# EAGLE board SonoluxV1 (EAGLE 9.7.0)
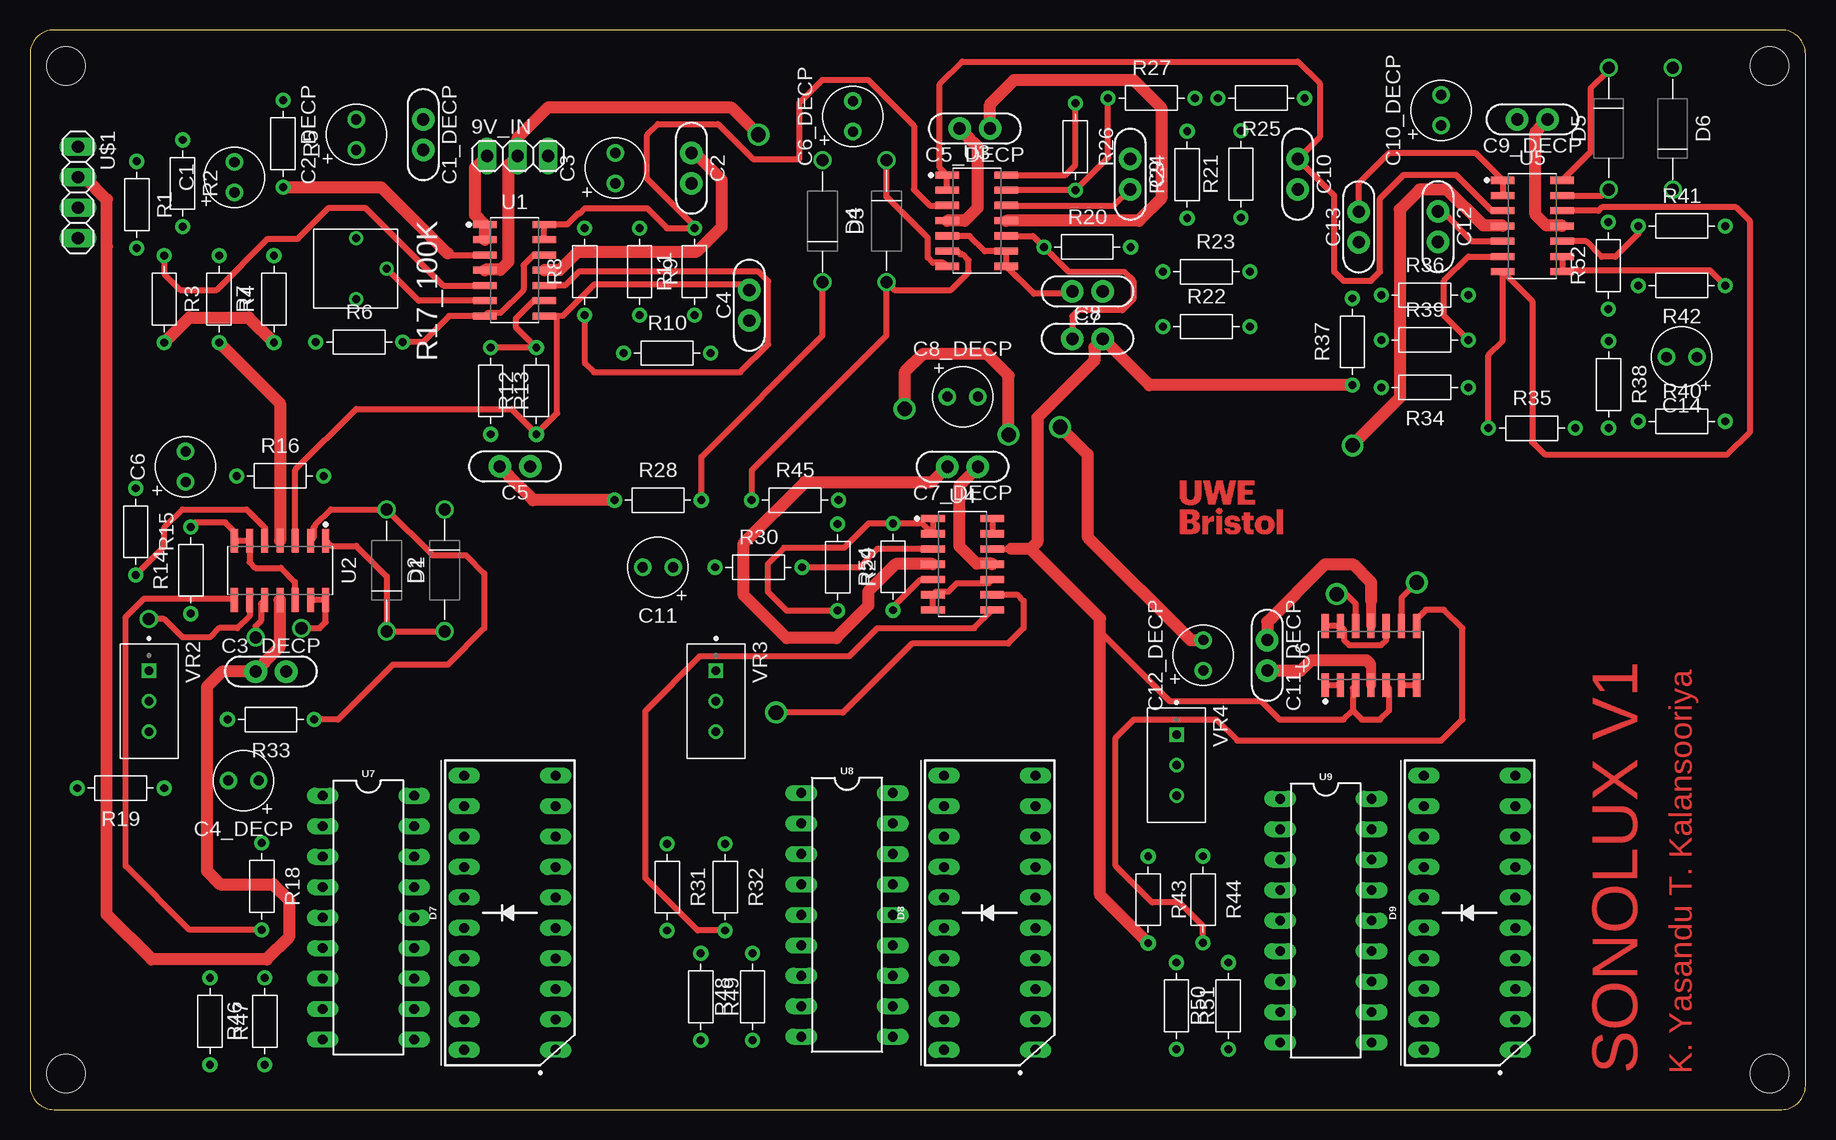
[diagram p0: board, top side]
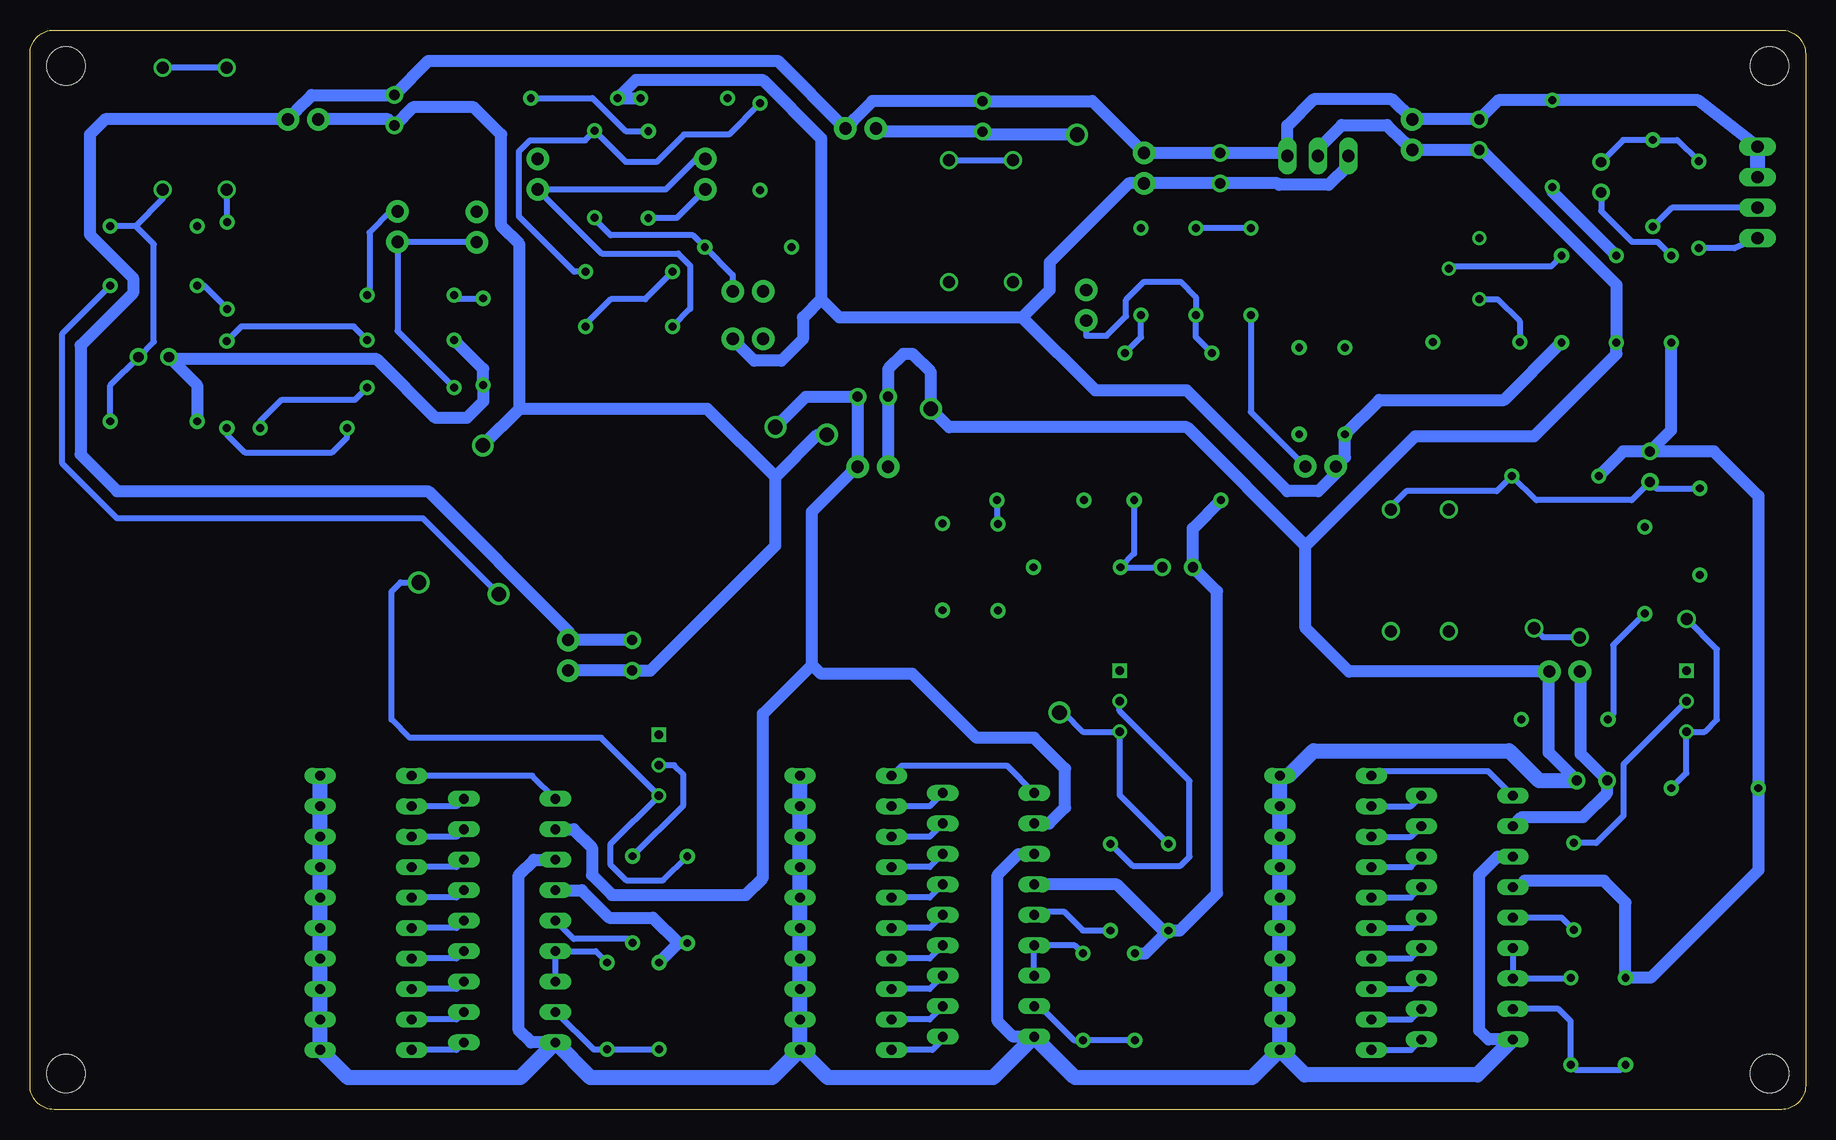
[diagram p1: board, bottom side, seen from below]

Size 148 x 90 mm. Coordinates in mm from the lower left corner, seen from the top.
Outline: 0,88 0,2 arc90 2,0 146,0 arc90 148,2 148,88 arc90 146,90 2,90 arc90 0,88
Copper layers (1*16): Top 0.035mm / dielectric 1.5mm / Bottom 0.035mm
Design rules "Fusion Electronics Design Rules": minimum track width 19mil, minimum drill 0.35mm, track to track 19mil, track to pad 15mil, pad to pad 19mil, via to via 19mil, smd to smd 19mil, copper to edge 40mil, drill to drill 6mil, minimum pad ring 10mil, minimum via ring 8mil, stop-mask expansion 4mil, vias tented up to drill 9999mil, thermal gap 10mil
Holes 3.2 mm at 3,87 3,3 145,3 145,87

## Footprints (pad centres in the part's own frame; a part is rotated, then mirrored left to right if it is on the bottom)
1X03 = drill 1.016 long: 1 -2.54,0; 2 0,0; 3 2.54,0
CAPPRD254W65D500H1150B = drill 0.85 pad 1.45: 1 -1.27,0; 2 1.27,0
CAP-THRU-2.54MM = drill 1.016 pad 1.88: 1 -1.27,0; 2 1.27,0
DIODE-AXIAL = drill 1: 1 -5.08,0; 2 5.08,0
LED_BARGRAPH_10 = drill 0.813 long: 1 -11.43,-3.81; 2 -8.89,-3.81; 3 -6.35,-3.81; 4 -3.81,-3.81; 5 -1.27,-3.81; 6 1.27,-3.81; 7 3.81,-3.81; 8 6.35,-3.81; 9 8.89,-3.81; 10 11.43,-3.81; 11 11.43,3.81; 12 8.89,3.81; 13 6.35,3.81; 14 3.81,3.81; 15 1.27,3.81; 16 -1.27,3.81; 17 -3.81,3.81; 18 -6.35,3.81; 19 -8.89,3.81; 20 -11.43,3.81
RESAD724W46L381D178B = drill 0.66 pad 1.26: 1 -3.62,0; 2 3.62,0
3362P-1-103LF = drill 0.66: 1 -2.54,0; 2 0,2.54; 3 2.54,0
SOIC127P600X175-14N = smd 1.968 x 0.599: 1 -2.473,3.81; 2 -2.473,2.54; 3 -2.473,1.27; 4 -2.473,0; 5 -2.473,-1.27; 6 -2.473,-2.54; 7 -2.473,-3.81; 8 2.473,-3.81; 9 2.473,-2.54; 10 2.473,-1.27; 11 2.473,0; 12 2.473,1.27; 13 2.473,2.54; 14 2.473,3.81
DIL18 = drill 0.813 long: 1 -10.16,-3.81; 2 -7.62,-3.81; 3 -5.08,-3.81; 4 -2.54,-3.81; 5 0,-3.81; 6 2.54,-3.81; 7 5.08,-3.81; 8 7.62,-3.81; 9 10.16,-3.81; 10 10.16,3.81; 11 7.62,3.81; 12 5.08,3.81; 13 2.54,3.81; 14 0,3.81; 15 -2.54,3.81; 16 -5.08,3.81; 17 -7.62,3.81; 18 -10.16,3.81
1X04 = drill 1.016 long: 1 -3.81,0; 2 -1.27,0; 3 1.27,0; 4 3.81,0
TRIM_3296W-1-103LF = drill 0.71 square: 1 -2.54,0 | drill 0.71: 2 0,0; 3 2.54,0

## Placement (x,y rotation side)
9V_IN  PINHD-1X03_1X03M  [1X03]  40.66,79.5 0 top
C1  3.3uF  [CAPPRD254W65D500H1150B]  17.03,77.72 90 top
C1_DECP  100nF  [CAP-THRU-2.54MM]  32.78,81.28 270 top
C2  100nF  [CAP-THRU-2.54MM]  55.13,78.48 270 top
C2_DECP  10uF  [CAPPRD254W65D500H1150B]  27.19,81.28 90 top
C3  10uF  [CAPPRD254W65D500H1150B]  48.78,78.48 90 top
C3_DECP  100nF  [CAP-THRU-2.54MM]  20.08,36.52 0 top
C4  47nF  [CAP-THRU-2.54MM]  59.96,67.05 90 top
C4_DECP  10uF  [CAPPRD254W65D500H1150B]  17.8,27.43 180 top
C5  47nF  [CAP-THRU-2.54MM]  40.43,53.62 180 top
C5_DECP  100nF  [CAP-THRU-2.54MM]  78.76,81.78 180 top
C6  1uF  [CAPPRD254W65D500H1150B]  12.97,53.59 90 top
C6_DECP  10uF  [CAPPRD254W65D500H1150B]  68.6,82.8 90 top
C7  22nF  [CAP-THRU-2.54MM]  88.15,68.2 180 top
C7_DECP  100nF  [CAP-THRU-2.54MM]  77.74,53.59 180 top
C8  10nF  [CAP-THRU-2.54MM]  88.15,64.26 0 top
C8_DECP  10uF  [CAPPRD254W65D500H1150B]  77.74,59.43 0 top
C9  47nF  [CAP-THRU-2.54MM]  91.71,77.97 270 top
C9_DECP  100nF  [CAP-THRU-2.54MM]  125.24,82.55 180 top
C10  47nF  [CAP-THRU-2.54MM]  105.68,77.97 270 top
C10_DECP  10uF  [CAPPRD254W65D500H1150B]  117.62,83.31 90 top
C11  1uF  [CAPPRD254W65D500H1150B]  52.34,45.21 180 top
C11_DECP  100nF  [CAP-THRU-2.54MM]  103.14,37.87 270 top
C12  10nF  [CAP-THRU-2.54MM]  117.36,73.61 270 top
C12_DECP  10uF  [CAPPRD254W65D500H1150B]  97.81,37.87 90 top
C13  10nF  [CAP-THRU-2.54MM]  110.76,73.58 90 top
C14  1uF  [CAPPRD254W65D500H1150B]  137.68,62.73 180 top
D1  DIODEDIODE-AXIAL  [DIODE-AXIAL]  29.73,44.95 270 top
D2  DIODEDIODE-AXIAL  [DIODE-AXIAL]  34.56,44.95 90 top
D3  DIODEDIODE-AXIAL  [DIODE-AXIAL]  71.39,74.06 90 top
D4  DIODEDIODE-AXIAL  [DIODE-AXIAL]  66.06,74.06 270 top
D5  DIODEDIODE-AXIAL  [DIODE-AXIAL]  131.59,81.78 90 top
D6  DIODEDIODE-AXIAL  [DIODE-AXIAL]  136.92,81.78 270 top
D7  RED  [LED_BARGRAPH_10]  40,16.4 90 top
D8  RED  [LED_BARGRAPH_10]  80,16.4 90 top
D9  RED  [LED_BARGRAPH_10]  120,16.4 90 top
R1  2.2k  [RESAD724W46L381D178B]  8.91,75.43 270 top
R2  2.2k  [RESAD724W46L381D178B]  12.72,77.21 270 top
R3  10k  [RESAD724W46L381D178B]  11.19,67.56 270 top
R4  10k  [RESAD724W46L381D178B]  15.76,67.56 270 top
R5  10k  [RESAD724W46L381D178B]  21.1,80.51 270 top
R6  2.2k  [RESAD724W46L381D178B]  27.45,63.98 0 top
R7  10k  [RESAD724W46L381D178B]  20.34,67.56 90 top
R8  8.2k  [RESAD724W46L381D178B]  46.24,69.85 90 top
R9  820  [RESAD724W46L381D178B]  50.82,69.85 270 top
R10  8.2k  [RESAD724W46L381D178B]  53.1,63.06 0 top
R11  820  [RESAD724W46L381D178B]  55.39,69.85 90 top
R12  5.6k  [RESAD724W46L381D178B]  42.21,59.91 90 top
R13  10k  [RESAD724W46L381D178B]  38.4,59.91 270 top
R14  10k  [RESAD724W46L381D178B]  13.41,44.96 90 top
R15  1k  [RESAD724W46L381D178B]  8.81,48.17 270 top
R16  100k  [RESAD724W46L381D178B]  20.84,52.83 0 top
R17_100K  3362P-1-103LF  [3362P-1-103LF]  27.19,70.1 270 top
R18  2.2k  [RESAD724W46L381D178B]  19.32,18.61 270 top
R19  10k  [RESAD724W46L381D178B]  7.55,26.79 180 top
R20  5.6k  [RESAD724W46L381D178B]  88.13,71.9 0 top
R21  3.3k  [RESAD724W46L381D178B]  100.93,77.97 90 top
R22  8.2k  [RESAD724W46L381D178B]  98.06,65.27 0 top
R23  820  [RESAD724W46L381D178B]  98.06,69.85 0 top
R24  8.2k  [RESAD724W46L381D178B]  96.46,77.95 90 top
R25  820  [RESAD724W46L381D178B]  102.63,84.32 180 top
R26  3.3k  [RESAD724W46L381D178B]  87.14,80.26 270 top
R27  5.6k  [RESAD724W46L381D178B]  93.49,84.32 0 top
R28  100k  [RESAD724W46L381D178B]  52.34,50.8 0 top
R29  10k  [RESAD724W46L381D178B]  67.33,45.21 270 top
R30  1k  [RESAD724W46L381D178B]  60.72,45.21 0 top
R31  10k  [RESAD724W46L381D178B]  53.12,18.54 270 top
R32  2.2k  [RESAD724W46L381D178B]  57.94,18.54 270 top
R33  10k  [RESAD724W46L381D178B]  20.08,32.51 180 top
R34  6.2k  [RESAD724W46L381D178B]  116.26,60.19 180 top
R35  180  [RESAD724W46L381D178B]  125.2,56.8 0 top
R36  6.2k  [RESAD724W46L381D178B]  116.27,67.89 0 top
R37  180  [RESAD724W46L381D178B]  110.23,64 90 top
R38  5.6k  [RESAD724W46L381D178B]  131.59,60.45 270 top
R39  10k  [RESAD724W46L381D178B]  116.27,64.16 0 top
R40  100k  [RESAD724W46L381D178B]  137.68,57.37 0 top
R41  1k  [RESAD724W46L381D178B]  137.68,73.66 0 top
R42  10k  [RESAD724W46L381D178B]  137.68,68.7 180 top
R43  10k  [RESAD724W46L381D178B]  93.21,17.5 270 top
R44  2.2k  [RESAD724W46L381D178B]  97.78,17.51 270 top
R45  10k  [RESAD724W46L381D178B]  63.77,50.8 0 top
R46  1.2k  [RESAD724W46L381D178B]  19.57,7.36 90 top
R47  1.5k  [RESAD724W46L381D178B]  15,7.36 270 top
R48  1.2k  [RESAD724W46L381D178B]  60.23,9.39 90 top
R49  1.5k  [RESAD724W46L381D178B]  55.91,9.39 270 top
R50  1.2k  [RESAD724W46L381D178B]  99.89,8.63 90 top
R51  1.5k  [RESAD724W46L381D178B]  95.57,8.63 270 top
R52  10k  [RESAD724W46L381D178B]  131.56,70.35 90 top
R54  0  [RESAD724W46L381D178B]  71.94,45.25 90 top
U1  LM324_SOIC  [SOIC127P600X175-14N]  40.39,69.97 0 top
U2  LM324_SOIC  [SOIC127P600X175-14N]  20.84,44.95 270 top
U3  LM324_SOIC  [SOIC127P600X175-14N]  78.92,74.1 0 top
U4  LM324_SOIC  [SOIC127P600X175-14N]  77.74,45.46 0 top
U5  LM324_SOIC  [SOIC127P600X175-14N]  125.24,73.66 0 top
U6  LM324_SOIC  [SOIC127P600X175-14N]  111.78,37.84 90 top
U7  LM391N  [DIL18]  28.21,16 270 top
U8  LM391N  [DIL18]  68.1,16.23 270 top
U9  LM391N  [DIL18]  108.01,15.74 270 top
U$1  PINHD-1X04_1X04M  [1X04]  4,76.45 270 top
VR2  3296W-1-103LF  [TRIM_3296W-1-103LF]  9.92,34.03 270 top
VR3  3296W-1-103LF  [TRIM_3296W-1-103LF]  57.18,34.03 270 top
VR4  3296W-1-103LF  [TRIM_3296W-1-103LF]  95.57,28.7 270 top

## Library data of the parts
9V_IN C1 C1_DECP C2 C2_DECP C3 C3_DECP C4 C4_DECP C5 C5_DECP C6 C6_DECP C7 C7_DECP C8 C8_DECP C9 C9_DECP C10 C10_DECP C11 C11_DECP C12 C12_DECP C13 C14 D1-D6 U$1 = Tinkercad
D7-D9 = SparkFun-LED; PROD_ID: DIO-10615
R1-R5 R54 = Tutorial - Fusion 360; CATEGORY: Resistor; SUB-CATEGORY: Fixed
R6-R16 R18-R52 = Resistor; CATEGORY: Resistors; DESCRIPTION: Axial Resistor 7.24 mm pitch 3.81 mm body length 1.78 mm body diameter; PACKAGE_SIZE: AXIAL; PACKAGE_TYPE: THT
R17_100K = Potentiometer_Trimmers; CREATED_PN: PCBLayout.com; DIGIKEY_PN: 3362P-103LF-ND; MANUFACTURER: Bourns Inc.; MPN: 3362P-1-103LF
U1-U6 = IC_Linear; CATEGORY: Linear ICs; DESCRIPTION: General Purpose Amplifier 4 Circuit 14-SOIC Generic; PACKAGE_SIZE: 14-SOIC; PACKAGE_TYPE: Surface Mount; SERIES: LM324; SUBCATEGORY: Amplifiers; TYPE: General Purpose
U7-U9 = SparkFun-IC-Special-Function; SF_ID: COM-12694
VR2-VR4 = 3296W-1-103LF; AVAILABILITY: In Stock; CHECK_PRICES: https://www.snapeda.com/parts/3296W-1-103LF/Bourns/view-part/?ref=eda; DESCRIPTION: Trimmer, Cermet, Rest 10 Kilohms, PCB, 25 Turns, Pwr-Rtg 0.5W, 3296 Series | Bourns 3296W-1-103LF; MF: Bourns; MP: 3296W-1-103LF; PACKAGE: NON STANDARD-3 Bourns; PRICE: None; SNAPEDA_LINK: https://www.snapeda.com/parts/3296W-1-103LF/Bourns/view-part/?ref=snap

## Nets
9V: 9V_IN.2 C1_DECP.2 C2_DECP.1 C3_DECP.2 C4_DECP.1 C5_DECP.2 C6_DECP.1 C7_DECP.2 C8_DECP.1 C9_DECP.2 C10_DECP.1 C11_DECP.2 C12_DECP.1 D7.1 D7.2 D7.3 D7.4 D7.5 D7.6 D7.7 D7.8 D7.9 D7.10 D8.1 D8.2 D8.3 D8.4 D8.5 D8.6 D8.7 D8.8 D8.9 D8.10 D9.1 D9.2 D9.3 D9.4 D9.5 D9.6 D9.7 D9.8 D9.9 D9.10 R4.2 U1.4 U2.4 U3.4 U4.4 U5.4 U6.4 U7.3 U7.9 U8.3 U8.9 U9.3 U9.9
BPF_GAIN_OUT: R32.2 U4.8 U8.5
BPF_OUT: C7.2 U3.5 U3.8 U3.9
BPF_PKD_OUT: R29.2 R54.2 U4.1 U4.2
GND: 9V_IN.3 C1_DECP.1 C2.1 C2_DECP.2 C3.2 C3_DECP.1 C4_DECP.2 C5_DECP.1 C6_DECP.2 C7_DECP.1 C8_DECP.2 C9_DECP.1 C10_DECP.2 C11_DECP.1 C12_DECP.2 R5.1 U1.11 U2.11 U3.11 U4.11 U5.11 U6.11 U7.2 U8.2 U9.2 U$1.1 U$1.2
HPF_GAIN_OUT: R44.2 U6.8 U9.5
HPF_OUT: R35.1 R38.2 U5.7 U5.12
HPF_PKD_OUT: R42.1 U5.8 U5.9 U6.12
INPUT_BUFFERED2: C10.1 U3.1 U3.2 U5.3
INPUT_BUFFERED3: C13.2 U5.1 U5.2
INPUT_FILTERED: C1.1 R3.1 U1.5
INPUT_GAINED: R6.2 U1.7 U1.12
INPUT_MONO: C1.2 R1.1 R2.1
LPF_BUFFERED: U2.10 U2.13 U2.14
LPF_GAIN_OUT: R18.2 U2.8 U7.5
LPF_OUT: C4.2 R12.1 U1.8 U2.3
LPF_PKD_OUT: R14.2 U2.6 U2.7 U2.12
N$1: R6.1 R17_100K.3
N$2: R7.2 R17_100K.2 U1.6
N$3: C5.1 R8.1 U1.10
N$4: R8.2 R9.1
N$5: C4.1 R9.2 R10.1
N$6: R10.2 R11.1
N$7: D1.2 D2.1 U2.1
N$8: R12.2 R13.1 U1.9
N$9: D1.1 R33.1 U2.2
N$10: C9.1 C10.2 R22.1
N$11: C6.1 D2.2 R15.1 R16.2
N$12: R15.2 U2.5
N$13: C8.1 R20.1 U3.10
N$14: D5.1 R52.2 U5.13
N$15: C7.1 R20.2 R21.1
N$16: R18.1 VR2.2
N$18: R21.2 R23.2 R26.1 U3.14
N$19: C9.2 R24.1 U3.12
N$20: R22.2 R23.1
N$21: R24.2 R25.1
N$22: R26.2 R27.1 U3.13
N$23: D3.1 R45.1 U3.6
N$24: D3.2 D4.1 U3.7
N$25: C11.1 D4.2 R28.2 R30.1
N$26: R32.1 VR3.2
N$27: R30.2 U4.3
N$28: U4.6 U4.7 U4.10
N$29: R31.1 U4.9 VR3.3
N$30: R38.1 R39.2 U5.6
N$31: C12.2 C13.1 R34.2
N$32: R34.1 R35.2
N$33: R36.1 R37.2
N$34: C12.1 R36.2 U5.5
N$35: D5.2 D6.1 U5.14
N$36: C14.1 D6.2 R40.2 R41.2
N$37: R46.2 U7.6 U7.7
N$38: R41.1 U5.10
N$39: U6.10 U6.13 U6.14
N$40: R44.1 VR4.2
N$41: R43.1 U6.9 VR4.3
N$42: R46.1 R47.2 U7.8
N$43: D7.20 U7.10
N$44: D7.19 U7.11
N$45: D7.18 U7.12
N$46: D7.17 U7.13
N$47: D7.16 U7.14
N$48: D7.15 U7.15
N$49: D7.14 U7.16
N$50: D7.13 U7.17
N$51: D7.12 U7.18
N$52: D7.11 U7.1
N$53: R48.2 U8.6 U8.7
N$54: R48.1 R49.2 U8.8
N$55: D8.20 U8.10
N$56: D8.19 U8.11
N$57: D8.18 U8.12
N$58: D8.17 U8.13
N$59: D8.16 U8.14
N$60: D8.15 U8.15
N$61: D8.14 U8.16
N$62: D8.13 U8.17
N$63: D8.12 U8.18
N$64: D8.11 U8.1
N$65: R50.2 U9.6 U9.7
N$66: R50.1 R51.2 U9.8
N$67: D9.20 U9.10
N$68: D9.19 U9.11
N$69: D9.18 U9.12
N$70: D9.17 U9.13
N$71: D9.16 U9.14
N$72: D9.15 U9.15
N$73: D9.14 U9.16
N$74: D9.13 U9.17
N$75: D9.12 U9.18
N$76: D9.11 U9.1
N$77: R14.1 R33.2
N$78: R29.1 R45.2
N$79: R42.2 R52.1
N$80: U4.13 U4.14
N$81: U6.1 U6.2
N$82: U6.6 U6.7
N$83: R2.2 U$1.3
N$84: R1.2 U$1.4
N$85: R54.1 U4.5
N$86: R19.1 U2.9 VR2.3
N$88: R11.2 U1.13 U1.14 U3.3
VMID: 9V_IN.1 C2.2 C3.1 C5.2 C6.2 C8.2 C11.2 C14.2 R3.2 R7.1 R13.2 R16.1 R19.2 R25.2 R27.2 R28.1 R31.2 R37.1 R39.1 R40.1 R43.2 R47.1 R49.1 R51.1 U1.1 U1.2 U4.12 U6.3 U6.5 U7.4 U8.4 U9.4
VMID_RAW: R4.1 R5.2 U1.3

## Tracks (layer width: path | path; a pad name or v marks a point on that pad's centre or on a via)
9V  (via drill 1.22 pad 0.61)
  Top 0.813: 111.72,37.14 111.78,37.14 U6.4
  Top 1.016: U1.4 37.95,70.01 39.23,70.01 39.89,70.67 39.89,78.74 9V_IN.2 40.66,81.02 43.2,83.56 58.44,83.56 v60.72,81.28 | U4.4 72.15,45.46 69.87,43.18 69.87,41.98 67.19,39.31 63.07,39.31 59.49,42.88 59.49,47.23 64.58,52.32 75.2,52.32 C7_DECP.2 | R4.2 20.84,58.86 U2.4 | U3.4 77.93,74.1 79.01,75.18 79.01,80.21 78.2,81.03 78.2,81.07 C5_DECP.2 | U5.4 122.73,73.69 121.13,73.69 118.12,76.7 115.84,76.7 114.17,75.03 114.17,59.34 110.25,55.42 v110.25,55.37 | v72.91,58.42 72.91,61.46 74.44,62.99 79.77,62.99 81.58,61.18 v81.58,56.26 | 111.72,37.14 111.38,37.48 106.81,37.48 105.93,36.6 C11_DECP.2
  Bottom 1.016: U7.9 26.43,5.84 27.19,6.6 27.19,19.55 25.67,21.08 U7.3 | U8.9 66.05,6.07 67.34,7.36 67.34,19.55 65.59,21.31 U8.3 | U9.9 106.24,5.58 107.25,6.6 107.25,19.55 105.98,20.82 U9.3 | C7_DECP.2 C8_DECP.1 76.47,61.72 75.2,62.99 74.44,62.99 72.91,61.46 v72.91,58.42 71.39,56.89 51.58,56.89 41.67,46.99 | 9V_IN.2 40.66,80.06 38.65,82.06 34.89,82.06 33.54,80.72 33.49,80.72 C1_DECP.2 C2_DECP.1 27.01,80.01 15.76,68.76 R4.2 15.76,62.99 22.62,56.13 32.53,56.13 41.67,46.99 | 41.67,46.99 41.67,40.13 38.06,36.52 C3_DECP.2 21.4,36.47 21.4,29.77 C4_DECP.1 | C5_DECP.2 77.23,81.53 C6_DECP.1 68.34,81.28 v60.72,81.28 | C9_DECP.2 118.13,82.55 C10_DECP.1 116.09,83.56 111.01,83.56 108.73,81.28 108.73,73.66 107.2,72.13 107.2,58.42 | v81.58,56.26 82.34,56.26 85.87,52.73 | C11_DECP.2 C12_DECP.1 96.28,36.6 85.87,47.01 85.87,52.73 | 107.2,58.42 v110.25,55.37 | 85.87,52.73 91.56,58.42 107.2,58.42
  Bottom 1.27: D7.1 D7.2 D7.3 D7.4 D7.5 D7.6 D7.7 D7.8 D7.9 D7.10 43.09,27.83 41.02,29.9 24.7,29.9 22.22,27.43 C4_DECP.1 | D8.1 D8.2 D8.3 D8.4 D8.5 D8.6 D8.7 D8.8 D8.9 D8.10 | D9.10 D9.9 D9.8 D9.7 D9.6 D9.5 D9.4 D9.3 D9.2 D9.1 121.49,2.65 107.14,2.65 U9.9 101.27,2.65 86.13,2.65 D8.1 | D7.1 41.73,2.89 27.34,2.89 U7.9 | D7.1 46.13,2.65 60.88,2.65 U8.9 67.71,2.65 81.49,2.65 D8.1
BPF_GAIN_OUT
  Top 0.483: R32.2 55.65,14.92 51.29,19.27 51.29,33.22 55.87,37.8 68.3,37.8 70.63,40.13 78.69,40.13 U4.8
  Bottom 0.483: U8.5 64.02,16.51 61.82,16.51 60.23,14.92 R32.2
BPF_OUT
  Top 0.483: C7.2 86.88,68 83.68,68 U3.8 U3.9 79.58,71.56 78.31,72.83 U3.5
BPF_PKD_OUT
  Top 0.483: U4.1 U4.2 74.4,48.87 R54.2 69.9,48.87 67.84,46.81 62.84,46.81 61.48,45.46 61.48,43.18 63.07,41.59 R29.2
GND  (via drill 1.22 pad 0.61)
  Top 0.813: 111.78,42.41 U6.11
  Top 1.016: C2.1 55.39,79.75 57.67,77.47 57.67,73.6 55.6,71.53 45.7,71.53 44.17,70.01 42.9,70.01 U1.11 | U5.11 127.67,73.69 126.4,73.69 125.49,74.6 125.49,81.48 125.8,81.79 125.8,81.83 C9_DECP.1 | C5_DECP.1 80.03,83.82 82.06,85.85 91.96,85.85 94.3,83.51 94.3,75.95 92.45,74.1 U3.11 | U2.11 20.81,42.44 20.81,38.56 19.52,37.27 19.52,37.23 C3_DECP.1 16.04,36.52 14.74,35.22 14.74,19.88 15.83,18.79 20.28,18.79 21.6,17.47 21.6,14.36 19.75,12.5 10.12,12.5 6.38,16.24 6.38,71.92 6.41,71.96 6.41,75.86 4.56,77.72 U$1.2 | U4.11 80.17,45.5 78.9,45.5 77.49,46.92 77.49,52.02 79.03,53.57 C7_DECP.1 | C11_DECP.1 103.14,40.66 107.94,45.46 110.25,45.46 111.78,43.94 111.78,42.41 | v85.87,56.89 88.15,54.61 88.15,47.75 96.77,39.14 C12_DECP.2
  Bottom 1.016: U7.2 23.64,24.38 18.56,24.38 16.53,26.41 C4_DECP.2 18.74,29.64 18.74,36.45 C3_DECP.1 | U$1.1 8.95,84.13 R5.1 25.61,84.13 C2_DECP.2 C1_DECP.1 34.46,84.22 41.01,84.22 43.2,82.04 9V_IN.3 43.45,79.75 C3.2 C2.1 59.45,84.07 C6_DECP.2 77.79,84.07 79.31,82.54 79.31,82.5 C5_DECP.1 85.67,87.42 114.77,87.42 C10_DECP.2 124.52,84.58 125.8,83.3 125.8,83.26 C9_DECP.1 141.75,82.55 143.02,81.28 143.02,72.95 139.4,69.33 139.4,68.07 143.78,63.69 143.78,54.61 140.73,51.56 114.82,51.56 103.14,39.87 C11_DECP.1 C12_DECP.2 | U8.2 63.05,23.85 61.72,25.18 61.72,28.41 64.29,30.98 69.1,30.98 74.44,36.32 82.06,36.32 82.82,37.08 | 82.82,37.08 82.82,49.84 79.08,53.59 C7_DECP.1 C8_DECP.2 83.33,59.43 v85.87,56.89 | U9.2 102.68,23.36 101.16,21.84 101.16,19.55 99.48,17.88 88.35,17.88 86.92,19.32 86.92,32.98 82.82,37.08
  Bottom 1.27: U$1.2 U$1.1
HPF_GAIN_OUT
  Top 0.483: U6.8 115.59,40.89 116.35,41.65 117.87,41.65 119.4,40.13 119.4,32.51 117.64,30.75 100.62,30.75 98.87,32.51 92.01,32.51 90.49,30.98 90.49,20.32 93.54,17.27 95.82,17.27 97.78,15.31 R44.2
  Bottom 0.483: R44.2 98.11,14.22 102.68,14.22 U9.5
HPF_OUT
  Top 0.483: R35.1 121.58,62.88 122.77,64.07 U5.7 125.23,67.38 125.23,55.63 126.25,54.61 141.49,54.61 143.38,56.49 143.38,74.06 142.21,75.23 131.04,75.23 130.74,74.93 U5.12
  Bottom 0.483: R38.2 131.59,56.28 130.1,54.79 122.83,54.79 121.58,56.04 R35.1
HPF_PKD_OUT  (via drill 1.22 pad 0.61)
  Top 0.483: U5.9 U5.8 127.82,69.95 140.05,69.95 R42.1 | U6.12 110.51,42.16 109.69,42.97 v108.93,42.97
  Bottom 0.483: R42.1 145.3,64.7 145.3,53.84 140.73,49.27 115.23,49.27 v108.93,42.97
INPUT_BUFFERED2
  Top 0.483: U3.2 U3.1 75.82,78.53 75.82,85.47 77.72,87.37 105.68,87.37 107.5,85.55 107.5,81.07 C10.1 108.73,76.2 108.73,69.85 109.49,69.08 111.78,69.08 112.54,69.85 112.54,75.94 114.53,77.94 118.86,77.94 121.87,74.93 U5.3
INPUT_BUFFERED3
  Top 0.483: U5.2 U5.1 120.48,79.75 113.3,79.75 110.76,77.21 C13.2
INPUT_FILTERED
  Top 0.483: R3.1 11.19,69.66 12.53,68.32 15.55,68.32 19.82,72.59 22.32,72.59 24.91,75.18 27.96,75.18 34.44,68.7 U1.5
  Bottom 0.483: R3.1 12.35,72.34 14.47,72.34 17.03,74.9 C1.1
INPUT_GAINED
  Top 0.483: R6.2 32.76,63.98 34.94,66.16 U1.7 38.16,66.41 39.2,66.41 41.13,68.33 41.13,70.39 41.97,71.24 U1.12
INPUT_MONO
  Bottom 0.483: R1.1 10.69,80.83 R2.1 15.19,80.83 C1.2
LPF_BUFFERED  (via drill 1.02 pad 0.61)
  Top 0.483: U2.13 U2.14 24.65,40.64 24.15,40.13 v22.62,40.13 | U2.10 19.27,42.18 19.27,40.74 18.81,40.29 v18.81,39.37
  Bottom 0.483: v22.62,40.13 21.86,39.37 v18.81,39.37
LPF_GAIN_OUT
  Top 0.483: U2.8 16.93,42.59 9.5,42.59 7.96,41.05 7.96,20.3 13.27,14.98 R18.2
  Bottom 0.483: U7.5 20.33,16 R18.2
LPF_OUT
  Top 0.483: C4.2 59.5,68.78 47.03,68.78 44.41,66.16 43.96,66.16 | U1.8 43.96,66.16 | 43.96,66.16 43.96,58.05 R12.1 42.2,56.36 40.15,58.42 27.19,58.42 22.11,53.34 U2.3
LPF_PKD_OUT
  Top 0.483: R14.2 13.78,48.95 16.27,48.95 17.03,48.19 U2.7 U2.6 18.3,45.63 18.78,45.15 20.92,45.15 22.08,43.99 22.08,42.52 U2.12
N$1
  Bottom 0.483: R17_100K.3 25.67,67.56 23.83,65.72 R6.1
N$2
  Top 0.483: R17_100K.2 32.41,67.43 U1.6
  Bottom 0.483: R7.2 21.23,70.29 29.54,70.29 R17_100K.2
N$3
  Top 0.483: R8.1 46.24,62.23 47.01,61.46 59.2,61.46 61.52,63.79 61.52,69.05 60.68,69.88 45.79,69.88 44.65,68.74 42.9,68.74 U1.10
  Bottom 0.483: R8.1 46.24,58.16 C5.1
N$4
  Bottom 0.483: R8.2 R9.1
N$5
  Bottom 0.483: R10.1 50.82,64.4 R9.2 50.82,67.75 52.07,69 55.15,69 56.64,67.51 56.64,66.13 58.26,64.51 59.96,64.51 C4.1
N$6
  Bottom 0.483: R10.2 55.39,64.39 R11.1
N$7
  Top 0.483: U2.1 25.09,46.99 27.19,46.99 29.73,44.45 D1.2 D2.1
N$8
  Top 0.483: R13.1 R12.2 40.49,65.25 40.49,65.95 41.97,67.43 U1.9
N$9
  Top 0.483: U2.2 23.63,47.67 23.63,48.51 23.73,48.61 23.73,48.67 25.1,50.03 D1.1 33.54,46.22 36.34,46.22 37.86,44.7 37.86,40.13 34.81,37.08 30.24,37.08 25.67,32.51 R33.1
N$10
  Bottom 0.483: R22.1 92.96,66.75 92.96,70.35 93.98,71.37 100.35,71.37 C10.2 95.01,76.7 92.47,79.24 C9.1
N$11
  Bottom 0.483: R15.1 12.44,51.79 C6.1 14.49,50.8 22.43,50.8 R16.2 25.73,51.56 33.29,51.56 34.56,50.29 D2.2
N$12
  Top 0.483: R15.2 11.19,46.93 11.19,48.51 12.72,50.03 18.05,50.03 19.57,48.51 U2.5
N$13
  Top 0.483: U3.10 83.58,72.83 R20.1 86.57,69.85 91.2,69.85 91.96,69.08 91.96,67.56 91.04,66.64 87.39,66.64 86.88,66.13 C8.1
N$14
  Top 0.483: U5.13 131.08,76.2 D5.1
  Bottom 0.483: D5.1 131.59,74 R52.2
N$15
  Bottom 0.483: C7.1 89.42,69.58 R20.2 92.74,72.89 99.58,72.89 100.93,74.24 R21.1
N$16
  Bottom 0.483: R18.1 17.45,22.23 15.18,24.49 15.18,28.77 VR2.2
N$18
  Top 0.483: U3.14 86.31,77.91 87.14,78.74 R26.1
  Bottom 0.483: R23.2 102.63,69.85 107.24,74.46 107.24,79.89 106.33,80.81 101.72,80.81 R21.2 98.33,78.99 95.77,78.99 93.49,81.28 89.74,81.28 R26.1
N$19
  Top 0.483: C9.2 90.37,75.37 U3.12
  Bottom 0.483: C9.2 94.09,74.33 R24.1
N$20
  Bottom 0.483: R23.1 96.73,67.56 99.58,67.56 101.68,65.46 R22.2
N$21
  Bottom 0.483: R24.2 98.35,81.56 101.11,84.32 R25.1
N$22
  Top 0.483: R27.1 89.87,79.37 R26.2 U3.13
N$23
  Top 0.483: U3.6 77.3,71.56 77.54,71.31 77.73,71.31 78.25,70.79 78.25,69.85 78.15,69.75 78.15,69.69 76.78,68.32 72.05,68.32 D3.1 71.39,64.51 60.15,53.27 R45.1
N$24
  Top 0.483: D3.2 71.39,76.09 74.84,72.65 74.84,71 75.25,70.59 76.14,70.59 U3.7
  Bottom 0.483: D3.2 D4.1
N$25
  Top 0.483: R28.2 55.96,54.42 66.06,64.51 D4.2
  Bottom 0.483: R28.2 55.96,46.35 R30.1 C11.1
N$26
  Bottom 0.483: R32.1 56.1,20.32 52.1,20.32 51.34,21.08 51.34,27.39 57.18,33.23 VR3.2
N$27
  Top 0.483: U4.3 70.65,46.73 69.13,45.21 R30.2
N$28
  Top 0.483: U4.7 U4.6 75.51,43.17 76.55,43.17 77.27,43.89 79.91,43.89 U4.10
N$29  (via drill 1.22 pad 0.61)
  Top 0.483: U4.9 82.31,42.92 82.82,42.41 82.82,40.13 81.53,38.84 73.5,38.84 67.76,33.09 v62.19,33.09
  Bottom 0.483: v62.19,33.09 61.83,33.09 60.23,31.49 VR3.3 57.18,26.22 R31.1
N$30
  Top 0.483: R39.2 117.87,66.18 117.87,69.08 119.9,71.12 U5.6
  Bottom 0.483: R39.2 121.01,65.27 130.38,65.27 R38.1
N$31
  Bottom 0.483: C13.1 117.34,72.31 C12.2 117.36,64.91 R34.2
N$32
  Bottom 0.483: R34.1 120.9,59.18 127.02,59.18 128.82,57.38 R35.2
N$33
  Bottom 0.483: R37.2 112.39,67.62 R36.1
N$34
  Top 0.483: C12.1 117.71,74.88 120.2,72.39 U5.5
  Bottom 0.483: R36.2 119.69,68.09 119.69,73.11 117.92,74.88 C12.1
N$35
  Top 0.483: U5.14 130.06,79.82 130.06,85.09 131.59,86.61 D5.2
  Bottom 0.483: D5.2 D6.1
N$36
  Bottom 0.483: R40.2 141.3,60.38 C14.1 137.68,64 137.68,72.13 139.21,73.66 | 139.21,73.66 R41.2 | D6.2 136.92,75.94 139.21,73.66
N$37
  Bottom 0.483: U7.6 U7.7 19.64,10.92 R46.2
N$38
  Top 0.483: R41.1 134.06,73.01 132.15,71.1 131,71.1 129.71,72.39 U5.10
N$39
  Top 0.483: U6.14 U6.13 109.54,40.01 109.54,39.12 109.95,38.71 112.64,38.71 113.05,39.11 U6.10
N$40
  Bottom 0.483: R44.1 93.54,25.37 93.54,27.94 94.3,28.7 VR4.2
N$41  (via drill 1.22 pad 0.61)
  Top 0.483: v115.59,43.94 114.32,42.67 U6.9
  Bottom 0.483: v115.59,43.94 117.11,43.94 117.87,43.18 117.87,32.51 116.35,30.98 100.39,30.98 VR4.3 99.63,22.09 99.63,20.45 98.3,19.11 95.21,19.11 R43.1
N$42
  Bottom 0.483: R47.2 15.45,3.3 19.13,3.3 R46.1 19.57,7.36 20.59,8.38 U7.8
N$43
  Bottom 0.483: D7.20 32.89,4.97 U7.10
N$44
  Bottom 0.483: D7.19 32.89,7.51 U7.11
N$45
  Bottom 0.483: D7.18 32.89,10.05 U7.12
N$46
  Bottom 0.483: D7.17 32.89,12.59 U7.13
N$47
  Bottom 0.483: D7.16 32.89,15.13 U7.14
N$48
  Bottom 0.483: D7.15 32.89,17.67 U7.15
N$49
  Bottom 0.483: D7.14 32.89,20.21 U7.16
N$50
  Bottom 0.483: D7.13 32.89,22.75 U7.17
N$51
  Bottom 0.483: D7.12 32.89,25.29 U7.18
N$52
  Bottom 0.483: D7.11 35.83,28.19 32.46,28.19 32.45,28.2 26.45,28.2 U7.1
N$53
  Bottom 0.483: U8.7 U8.6 60.9,13.69 R48.2
N$54
  Bottom 0.483: R49.2 R48.1 60.99,5.77 63.83,8.61 U8.8
N$55
  Bottom 0.483: U8.10 71.91,5.85 72.79,4.97 D8.20
N$56
  Bottom 0.483: U8.11 73.01,7.51 D8.19
N$57
  Bottom 0.483: U8.12 73.01,10.05 D8.18
N$58
  Bottom 0.483: U8.13 73.01,12.59 D8.17
N$59
  Bottom 0.483: U8.14 73.01,15.13 D8.16
N$60
  Bottom 0.483: U8.15 73.01,17.67 D8.15
N$61
  Bottom 0.483: U8.16 73.01,20.21 D8.14
N$62
  Bottom 0.483: U8.17 73.01,22.75 D8.13
N$63
  Bottom 0.483: U8.18 73.01,25.29 D8.12
N$64
  Bottom 0.483: D8.11 75.35,28.67 66.58,28.67 U8.1
N$65
  Bottom 0.483: U9.7 U9.6 100.84,13.2 R50.2
N$66
  Bottom 0.483: U9.8 104.13,8.12 101.01,5.01 R50.1 R51.2
N$67
  Bottom 0.483: U9.10 112.44,4.97 D9.20
N$68
  Bottom 0.483: U9.11 112.44,7.51 D9.19
N$69
  Bottom 0.483: U9.12 112.44,10.05 D9.18
N$70
  Bottom 0.483: U9.13 112.44,12.59 D9.17
N$71
  Bottom 0.483: U9.14 112.44,15.13 D9.16
N$72
  Bottom 0.483: U9.15 112.44,17.67 D9.15
N$73
  Bottom 0.483: U9.16 112.44,20.21 D9.14
N$74
  Bottom 0.483: U9.17 112.44,22.75 D9.13
N$75
  Bottom 0.483: U9.18 112.44,25.29 D9.12
N$76
  Bottom 0.483: U9.1 106.13,27.83 D9.11
N$77
  Bottom 0.483: R33.2 16.02,32.95 16.02,38.73 R14.1
N$78
  Bottom 0.483: R45.2 67.39,48.89 R29.1
N$79
  Bottom 0.483: R52.1 131.56,66.77 133.49,68.7 R42.2
N$80
  Top 0.483: U4.14 U4.13
N$81
  Top 0.483: U6.2 U6.1
N$82
  Top 0.483: U6.7 U6.6
N$83
  Bottom 0.483: U$1.3 11.13,75.18 R2.2
N$84
  Bottom 0.483: U$1.4 5.91,71.81 R1.2
N$85
  Top 0.483: U4.5 75.21,44.13 74.17,44.13 71.94,41.9 R54.1
N$86  (via drill 1.02 pad 0.61)
  Top 0.483: v9.91,40.89 11.19,40.89 12.72,39.37 15,39.37 15.76,40.13 17.29,40.13 18.3,41.14 U2.9
  Bottom 0.483: R19.1 9.92,28.04 VR2.3 8.4,31.49 7.38,32.51 7.38,38.37 v9.91,40.89
N$88
  Top 0.483: U1.13 U1.14 44.78,73.78 45.73,74.72 45.84,74.72 46.24,75.13 51.44,75.13 53.1,73.47 R11.2 55.39,73.66 51.44,77.6 51.44,81.26 52.34,82.16 57.34,82.16 60.26,79.23 64.13,79.23 64.13,83.92 66.06,85.85 69.87,85.85 73.68,82.04 73.68,76.7 75.01,75.37 U3.3
VMID
  Top 0.483: U6.3 110.25,35.12 110.25,33.27 | 110.25,33.27 111.01,32.51 112.54,32.51 113.3,33.27 113.3,35.12 U6.5 | 110.25,33.27 109.49,32.51 104.16,32.51 102.63,34.03 95.01,34.03 89.2,39.84 89.2,40.92 | U4.12 81.8,46.73
  Top 1.016: U1.2 U1.1 37.1,74.59 37.1,78.48 9V_IN.1 | R3.2 13.29,66.04 18.24,66.04 R7.1 | C5.2 39.87,52.9 39.87,52.86 41.93,50.8 R28.1 | R43.2 89.2,17.88 89.2,40.92 83.39,46.73 | R37.1 93.3,60.38 C8.2 88.71,63.55 88.71,62.43 83.96,57.68 83.96,47.3 83.39,46.73 | 83.39,46.73 81.8,46.73
  Bottom 1.016: R27.2 R25.2 97.49,85.84 86.95,85.84 82.06,80.95 82.06,67.56 | 9V_IN.1 38.12,78.74 39.77,77.08 43.88,77.08 44.01,77.21 C3.1 C2.2 56.4,77.21 63.01,70.61 63.01,68.32 65.29,66.04 | C6.2 15.19,54.86 R16.1 | U7.4 23.94,18.54 23.41,19.07 16.8,19.07 15,17.27 R47.1 12.91,10.98 3.93,19.96 R19.2 3.93,51.16 7.64,54.86 C6.2 | R7.1 25.12,59.15 35.54,59.15 R13.2 38.4,54.38 C5.2 39.16,53.01 40.61,51.56 43.2,51.56 51.58,59.94 59.2,59.94 65.29,66.04 | C6.2 11.19,56.64 R3.2 | 82.06,67.56 83.58,66.04 83.58,64.21 85.36,62.43 87.64,62.43 89.42,64.21 C8.2 | 65.29,66.04 80.53,66.04 82.06,67.56 | U8.4 57.41,18.77 53.56,14.92 R31.2 | R31.2 52.17,14.92 49.05,18.03 49.05,43.19 C11.2 51.07,48.45 R28.1 | R49.1 55.02,13.01 R31.2 | R40.1 134.06,60.38 C14.2 136.23,62.55 119.08,62.55 114.18,57.65 111.6,57.65 110.23,59.02 R37.1 110.23,61.73 R39.1 | R51.1 93.94,13.88 R43.2 93.95,13.88 96.08,16 99.72,16 102,18.28 U9.4
VMID_RAW
  Top 0.483: 34.81,71.37 34.95,71.24 U1.3
  Top 1.016: R5.2 29.29,76.89 34.81,71.37
  Bottom 1.016: R4.1 21.1,76.51 R5.2
(copper drawn outside any net)
  shapes: Top area x1042

## Text on the board
Top: SONOLUX V1 | K. Yasandu T. Kalansooriya